# Altium PCB pcb_commutation.PcbDoc
Units mil, origin at the board's own origin, x right, y up, seen from the top; angles counter-clockwise.
Board outline 1425 x 995 mil, 4 copper layers (Top Layer, Internal Plane 1, Internal Plane 2, Bottom Layer); 9 components, 5 nets, 19 pads, 0 vias.
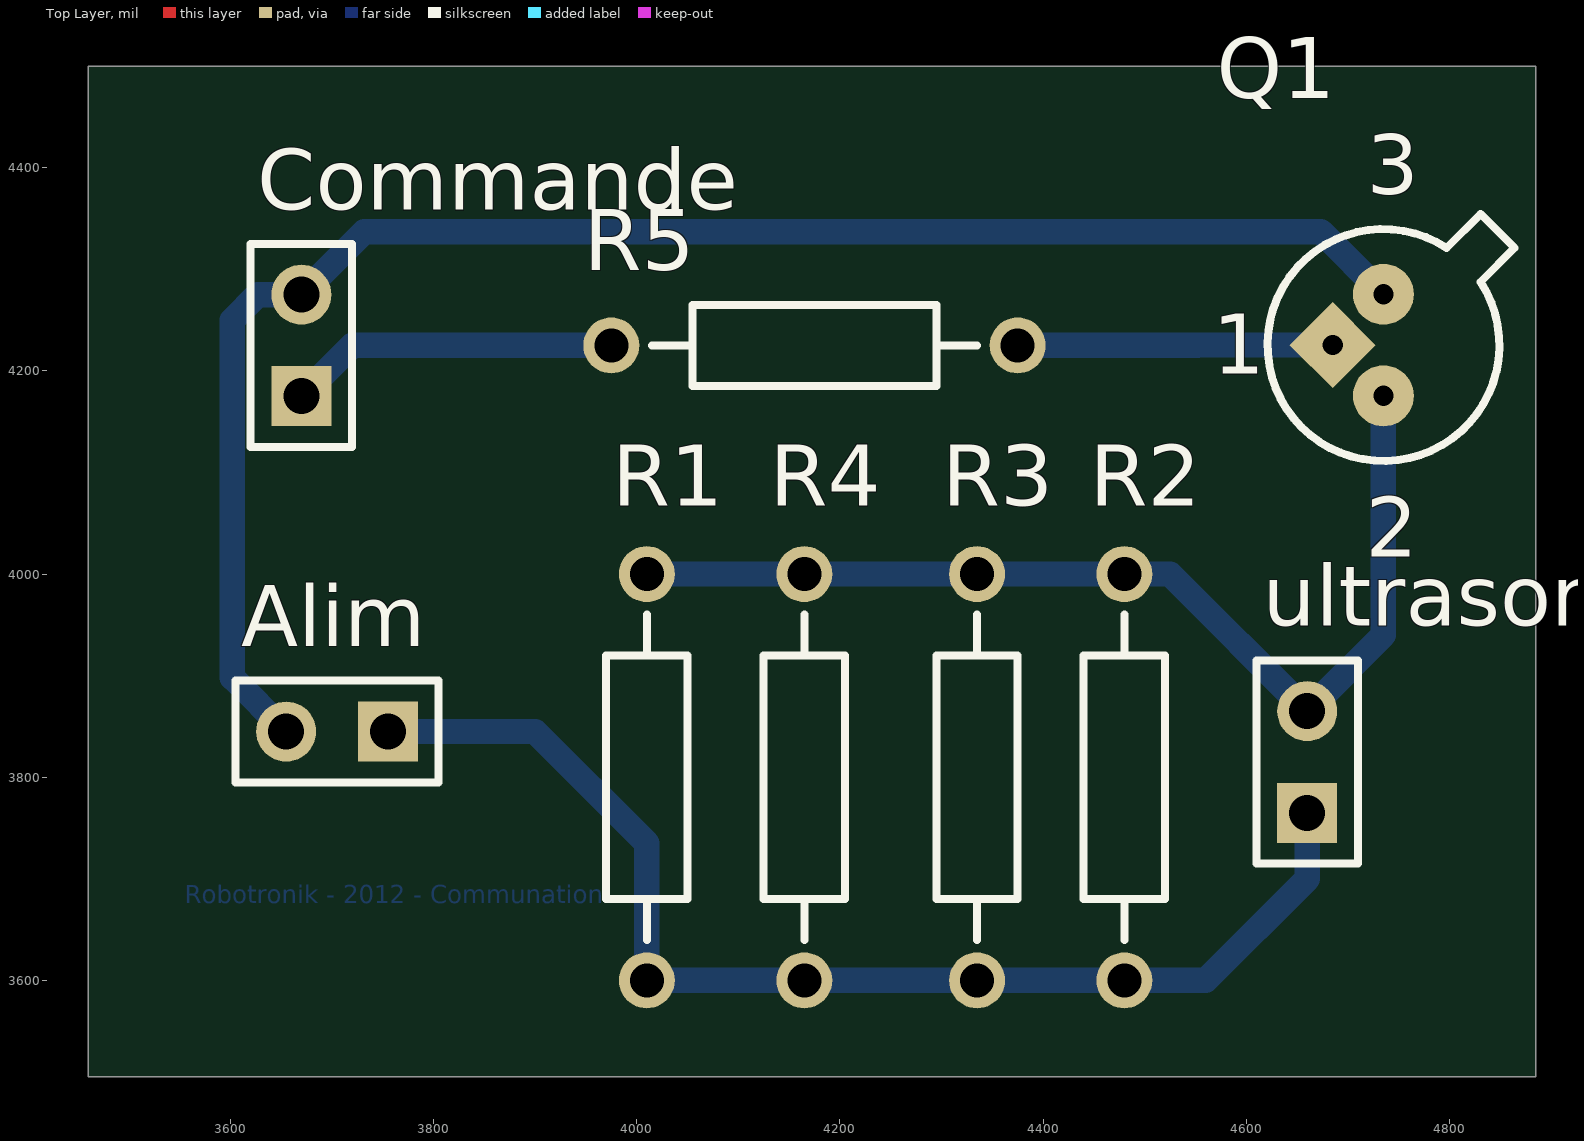
[diagram p0: Top Layer view]
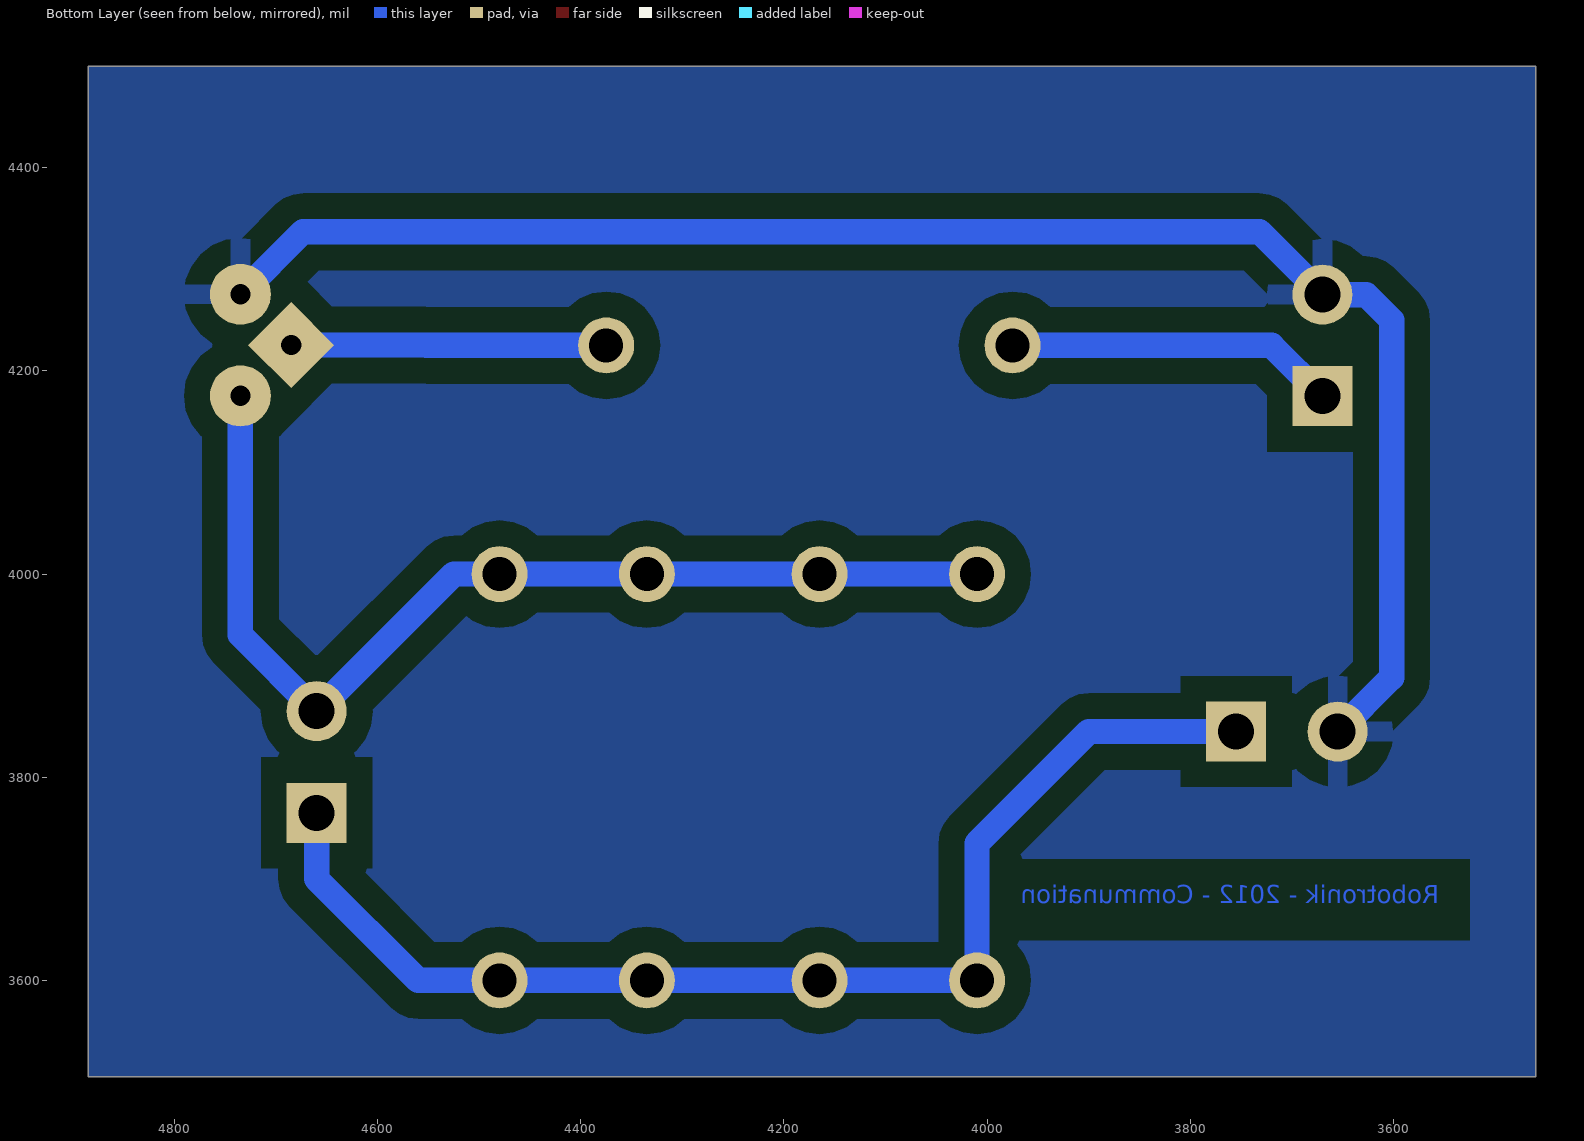
[diagram p1: Bottom Layer view, seen from below]
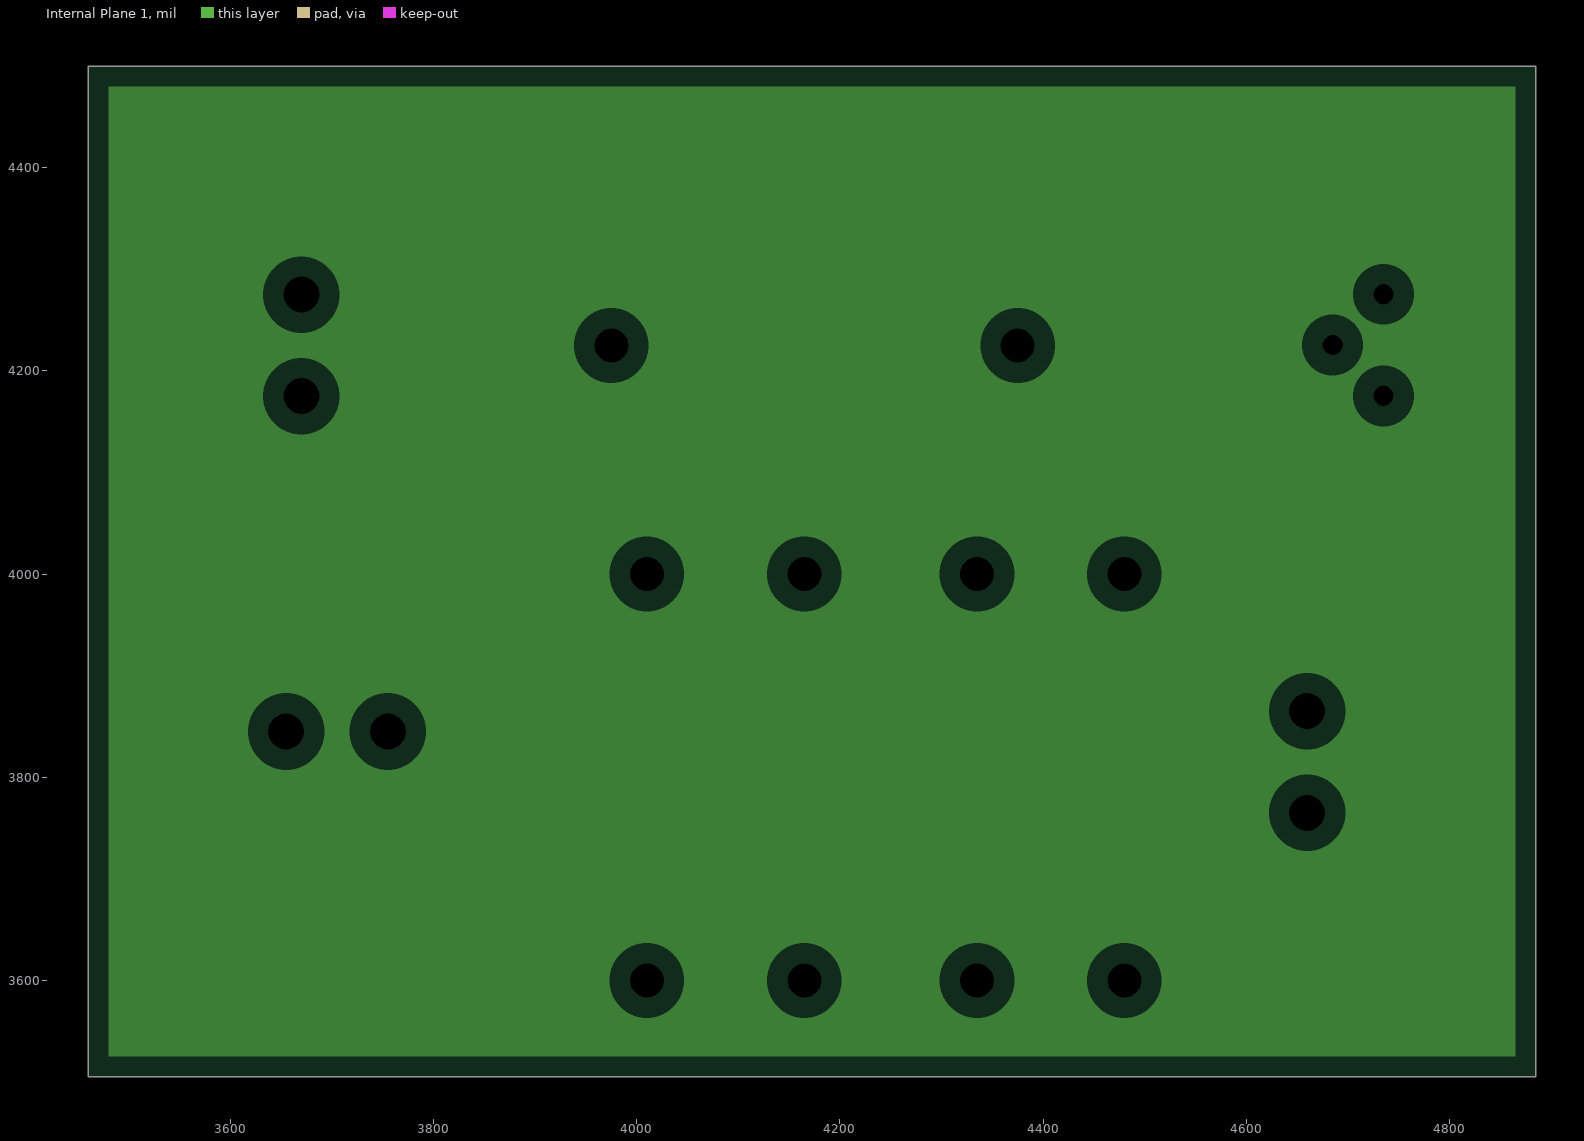
[diagram p2: Internal Plane 1, clearances drawn from the general rule]
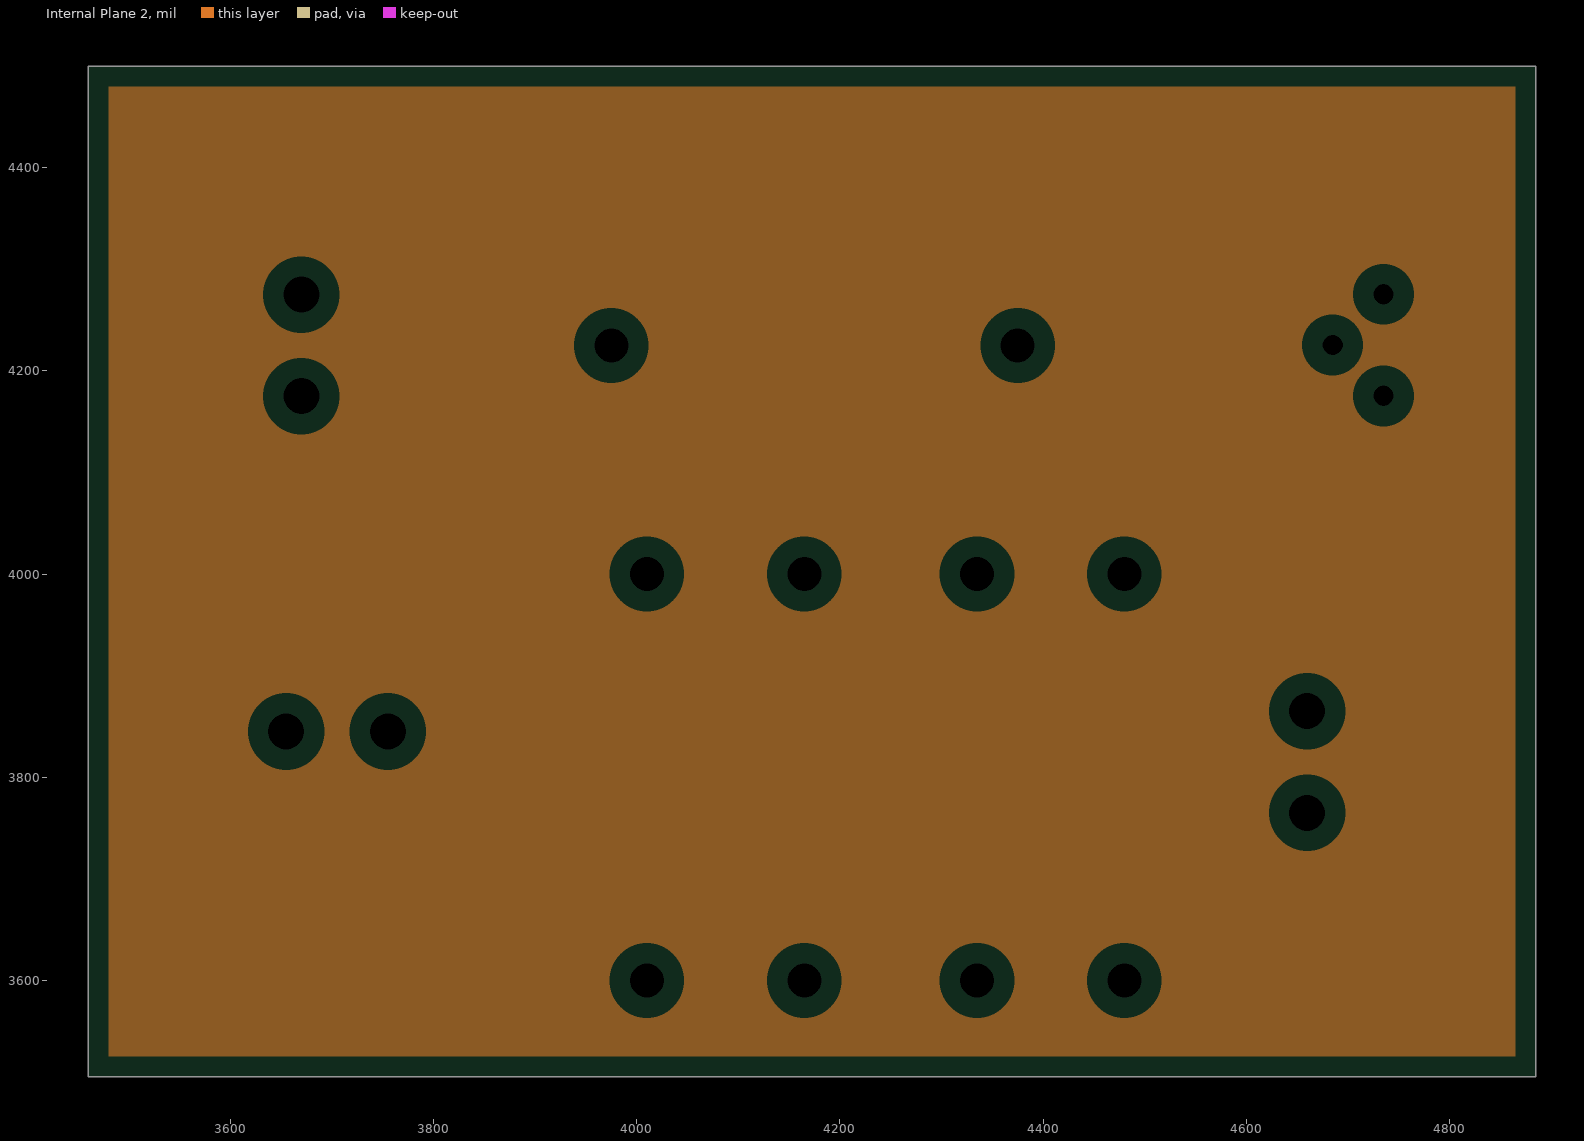
[diagram p3: Internal Plane 2, clearances drawn from the general rule]

## Layer stack, top to bottom
Top Layer: signal copper 1.4
Dielectric: dielectric 12.6, FR-4, Dk 4.8
Internal Plane 1: plane copper 1.4
Dielectric: dielectric 12.6, FR-4, Dk 4.8
Internal Plane 2: plane copper 1.4
Dielectric: dielectric 12.6, FR-4, Dk 4.8
Bottom Layer: signal copper 1.4

## Board outline
3460,4500 4885,4500 4885,3505 3460,3505

## Design rules (kind name [scope] priority, off if disabled: settings)
Clearance [All] p1: gap=25
FabricationTestPointUsage TestPointUsage [All] p1: valid=0 allowmultiple=FALSE
FabricationTestpoint Testpoint [All] p1: side=3 testpointundercomponent=TRUE minsize=40 maxsize=100 preferedsize=60 minholesize=0 maxholesize=40 preferedholesize=32 testpointgrid=1 allowsidetop=TRUE allowsidebottom=TRUE usegrid=TRUE gridtolerance=0.01
PlaneClearance [All] p1: clearance=20
PlaneConnect [All] p1: planeconnectstyle=Relief reliefexpansion=20 reliefentries=4 reliefconductorwidth=10 reliefairgap=10
PolygonConnect [All] p1: connectstyle=Relief reliefconductorwidth=20 reliefentries=4 polygonreliefangle="90 Angle"
RoutingLayers [All] p1: top layer_v5=FALSE bottom layer_v5=TRUE
RoutingVias [All] p1: holewidth=20 width=60 viastyle="Through Hole" minholewidth=28 minwidth=60 maxholewidth=28 maxwidth=60
SilkscreenOverComponentPads [All] p1: minsilkscreentomaskgap=10
SolderMaskExpansion [All] p1: expansion=4
Width [All] p1: maxlimit=25 minlimit=25 preferedwidth=25
22 further rules are at their usual default settings.

## Components (designator, comment, footprint, x,y, rotation, side; value= is the part's Value field where it differs from the comment)
Alim "Header 2" HDR1X2 3755,3845 r180 top
Commande "Header 2" HDR1X2 3670,4175 r90 top
Q1 "2N2222A" TO-18 4735,4225.38 r0 top
R1 "Res2" AXIAL-0.4 4010,3800 r270 top
R2 "Res2" AXIAL-0.4 4480,3800 r270 top
R3 "Res2" AXIAL-0.4 4335,3800 r270 top
R4 "Res2" AXIAL-0.4 4165,3800 r270 top
R5 "Res2" AXIAL-0.4 4175,4225 r180 top
ultrason "Header 2" HDR1X2 4660,3765 r90 top

## Footprints (in the part's own frame and the unit in brackets; to place one, negate y for a bottom-side part, rotate by r counter-clockwise, add the part's x,y. Pads: shape width x height; smd on the part's side, far side on the other; paste and mask are expansions set on the pad)
AXIAL-0.4 [mm] "Axial Device, Thru-Hole; 2 Leads; 0.4 in Pin Spacing"
  round 1.4 hole 0.85: 1(-5.08,0) 2(5.08,0)
  silkscreen extent -4.06,-1.02 4.06,1.02
HDR1X2 [mm] "Connector; Header; 2 Position"
  rect 1.5x1.5 hole 0.9: 1(0,0)
  round 1.5 hole 0.9: 2(2.54,0)
  silkscreen extent -1.27,-1.27 3.81,1.27
TO-18 [mil] "Can; 3 Leads; Pin Circle Dia. 2.54 mm; Lead Dia. 0.49 mm (max)"
  rect 60x60 hole 20 rot 45: 1(-50,0)
  round 60 hole 20: 2(0,-50) 3(0,50)
  silkscreen extent -114,-114 129,129

## Part data
Alim Commande ultrason: "Header, 2-Pin"
Q1: "High Speed Switches"
R1 R2 R3 R4 R5: "Resistor"

## Nets (pads, with @x,y where several pads share a name; then routed paths per layer and width w, separated by ;. In a path a pad name is that pad's centre, name@x,y a point inside that pad or via, vN(x,y) a via of type N, cw(c..) or ccw(c..) an arc to the next point about the centre after c; other vN are vias at no path point)
COMMANDE: Commande.1 R5.2 | length 325.7
  Bottom Layer w25: Commande.1 3720,4225 R5.2
GND: Alim.2 Commande.2 Q1.3 | length 1621.5
  Bottom Layer w25: Alim.2 3602,3898 3602,4250 3627,4275 Commande.2 3732,4337 4673.38,4337 Q1.3
NetQ1_1: Q1.1 R5.1 | length 310.2
  Bottom Layer w25: R5.1 4552.11,4225 4552.5,4225.38 Q1.1
NetQ1_2: Q1.2 R1.1 R2.1 R3.1 R4.1 ultrason.2 | length 1047.4
  Bottom Layer w25: R1.1 R4.1 R3.1 R2.1 4525,4000 ultrason.2 4735,3940 Q1.2
VCC: Alim.1 R1.2 R2.2 R3.2 R4.2 ultrason.1 | length 1192
  Bottom Layer w25: Alim.1 3900,3845 4010,3735 R1.2 R4.2 R3.2 R2.2 4560,3600 4660,3700 ultrason.1

## Polygon pours and split planes (outlines as drawn)
GND on Bottom Layer "Plan de masse" (solid, pour order 6): 3460,4500 4885,4500 4885,3505 3460,3505
no net on Internal Plane 1 (split plane): 4864.9,3525.1 3480.1,3525.1 3480.1,4479.9 4864.9,4479.9
no net on Internal Plane 2 (split plane): 4864.9,3525.1 3480.1,3525.1 3480.1,4479.9 4864.9,4479.9

## Keep-outs
Keep-Out Layer:
  lines w11.81: 2051.18,3051.18 2051.18,5704.72 5885.83,5704.72 5885.83,3051.18 2051.18,3051.18

## Other copper
Bottom Layer:
  text "Robotronik - 2012 - Communation" at 3555,3670 h30

## Dimensions
2051.18,3051.18 to 2051.18,5704.72 on Mechanical 1
2051.18,3051.18 to 5885.83,3051.18 on Mechanical 1

## Text inside footprints (layer, text, board x,y; h text height)
Q1: Top Overlay "3" at 4718.5,4373.89 h59.05; Top Overlay "2" at 4717.56,4017.08 h59.05; Top Overlay "1" at 4567.2,4197.12 h59.05